# Altium PCB GPS.PcbDoc
Units mm, origin at the board's own origin, x right, y up, seen from the top; angles counter-clockwise.
Board outline 70.99 x 79.22 mm, 2 copper layers (TopLayer, BottomLayer); 28 components, 23 nets, 124 pads, 0 vias.
Unrouted connection lines stored in the file: 3.
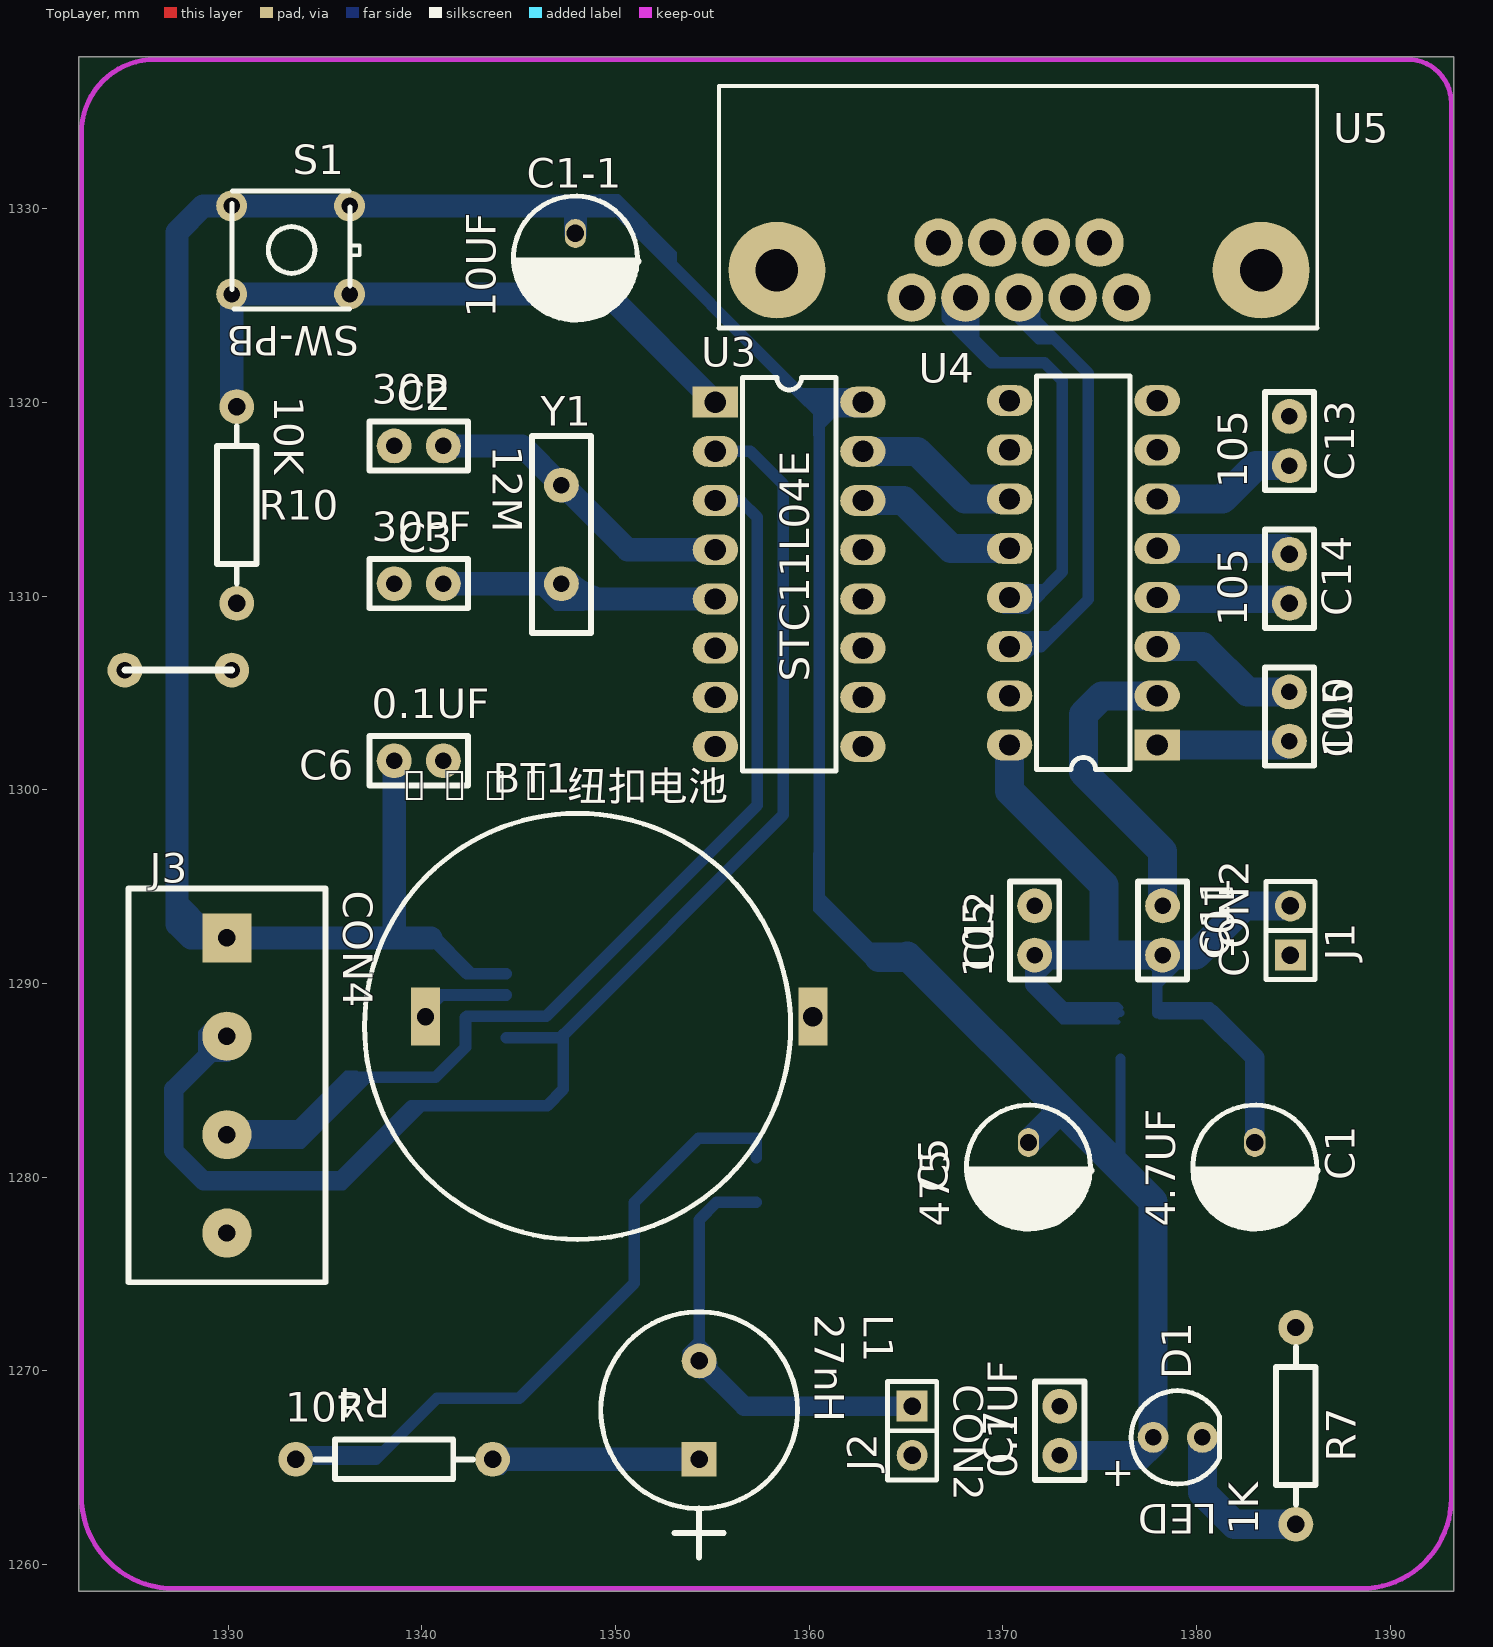
[diagram p0: TopLayer view]
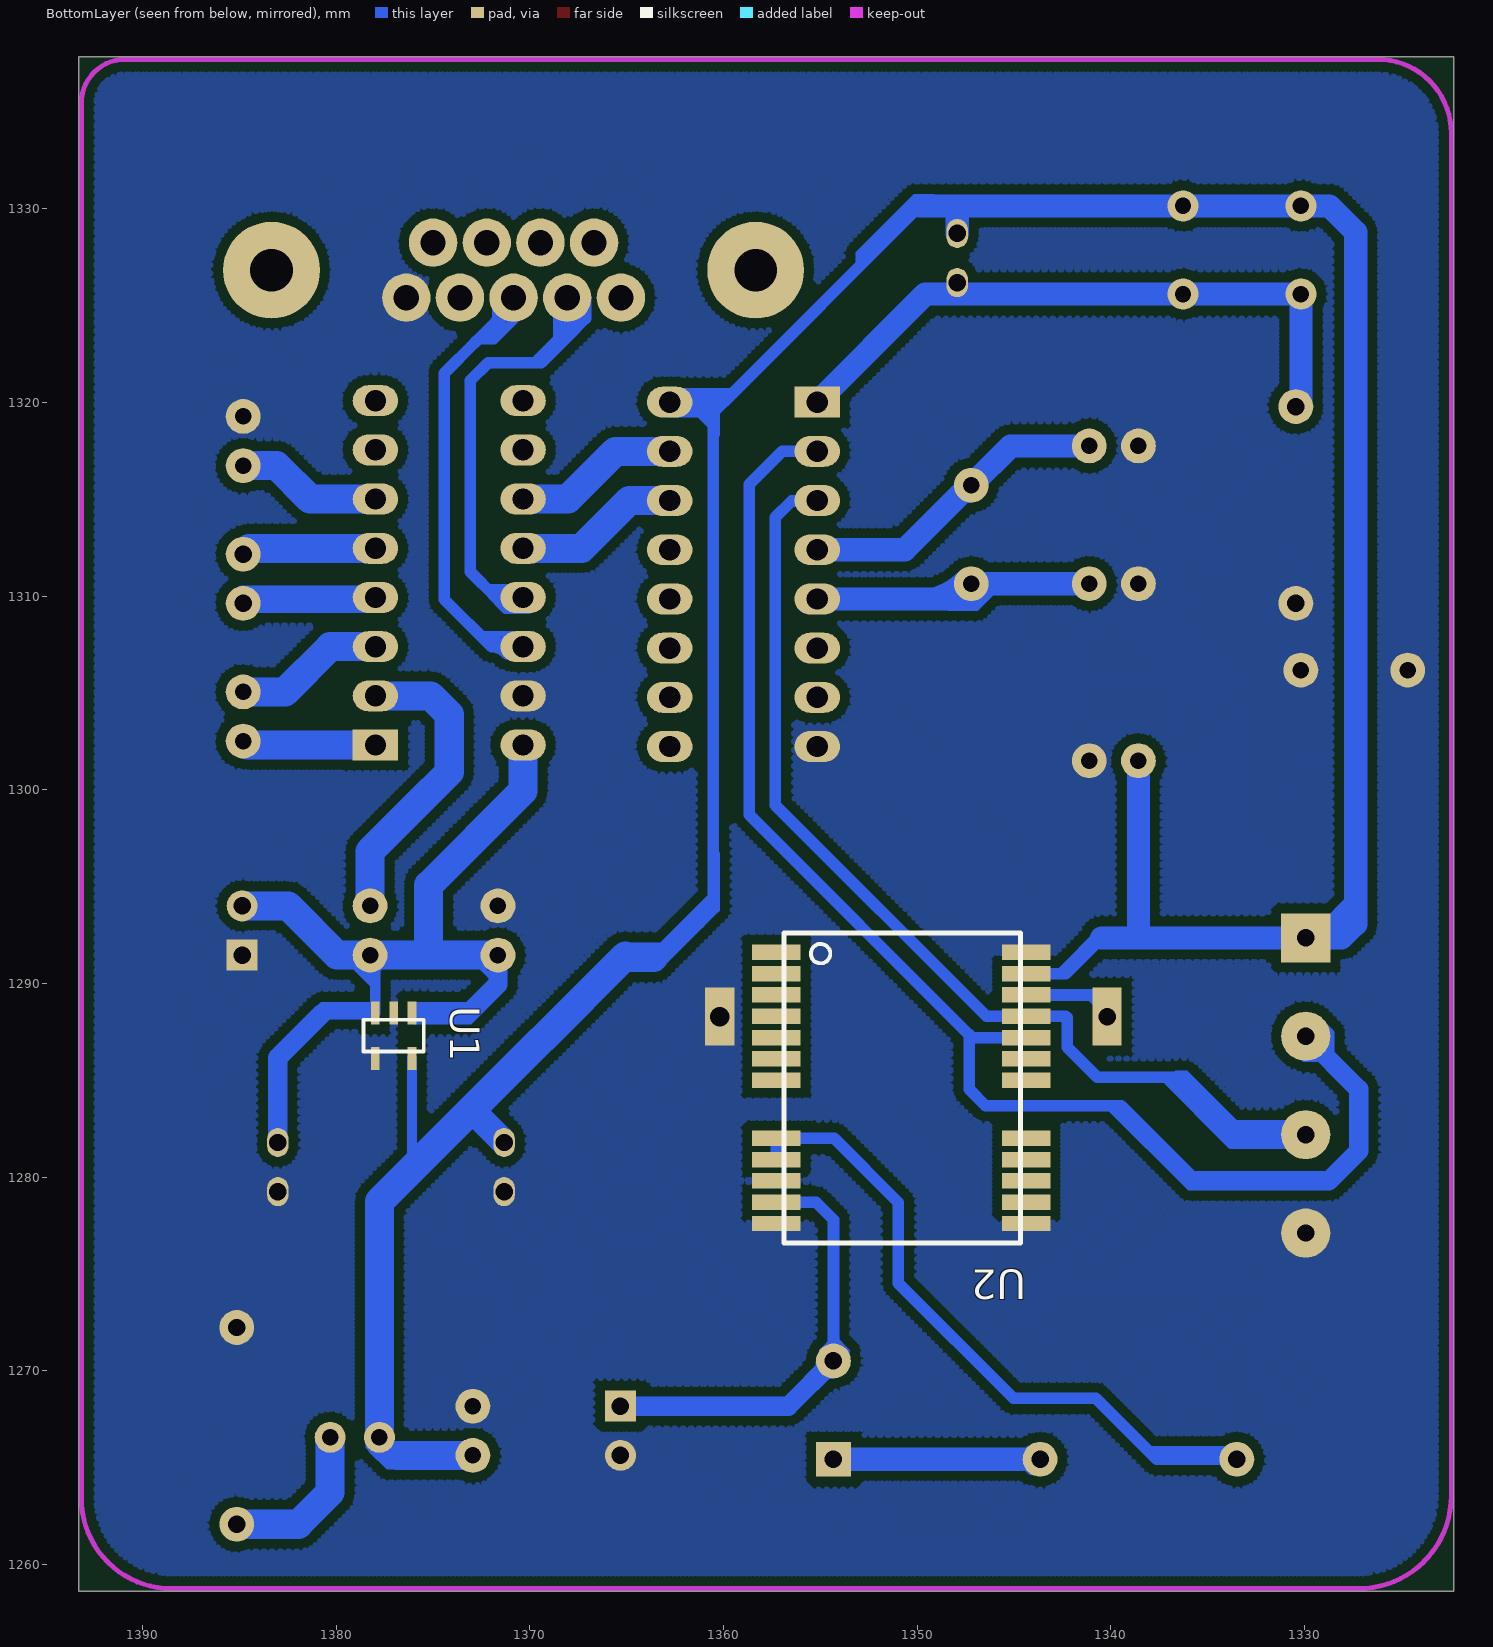
[diagram p1: BottomLayer view, seen from below]

## Layer stack, top to bottom
TopLayer: signal copper 0.0356
Dielectric: dielectric 0.32, FR-4, Dk 4.8
BottomLayer: signal copper 0.0356

## Board outline
1322.299,1258.621 1393.292,1258.621 1393.292,1337.843 1322.299,1337.843

## Design rules (kind name [scope] priority, off if disabled: settings)
Clearance [All] p1: gap=0.5
ComponentClearance [All] p1: gap=0.254 collisioncheckmode=0 verticalgap=0.254
PolygonConnect [All] p1: connectstyle=Direct reliefconductorwidth=0.6 reliefentries=4 polygonreliefangle="90 Angle"
RoomDefinition yabin [InComponentClass('yabin')] p1: confinementstyle=ConfineIn formatcopy=TRUE lockcomponents=FALSE outline 0,0 50.8,0 50.8,25.4 0,25.4
RoutingVias [All] p1: holewidth=0.711 width=1.27 viastyle="Through Hole" minholewidth=0.711 minwidth=1.27 maxholewidth=0.711 maxwidth=1.27
SolderMaskExpansion [All] p1: expansion=0.102
TestPointUsage [All] p1: valid=0 allowmultiple=FALSE
Testpoint [All] p1: side=15 testpointundercomponent=TRUE minsize=1.016 maxsize=2.54 preferedsize=1.524 minholesize=0.508 maxholesize=1.016 preferedholesize=0.813 testpointgrid=0.025 style=1023 order=0123456789
Width [All] p1: maxlimit=0.6 minlimit=0.6 preferedwidth=0.6
18 further rules are at their usual default settings.

## Components (designator, comment, footprint, x,y, rotation, side; value= is the part's Value field where it differs from the comment)
BT1 "3.3V 纽扣电池" CR2032 1346.708,1290.32 r0 top
C1 "4.7UF" 4.7UF 1384.325,1277.417 r90 top
C1-1 "10UF" 4.7UF 1349.248,1324.356 r90 top
C2 "30P" RAD-0.1#1 1338.58,1317.752 r0 top
C3 "30PF" RAD-0.1#1 1338.58,1310.64 r0 top
C5 "475" 4.7UF 1372.641,1277.417 r90 top
C6 "0.1UF" RAD-0.1#1 1338.58,1301.496 r0 top
C7 "0.1UF" RAD-0.1#1 1372.946,1265.631 r90 top
C10 "105" RAD-0.1#1 1384.808,1302.512 r90 top
C11 "105" RAD-0.1#1 1378.255,1294.003 r270 top
C12 "105" RAD-0.1#1 1371.651,1291.463 r90 top
C13 "105" RAD-0.1#1 1384.808,1316.736 r90 top
C14 "105" RAD-0.1#2 1384.808,1309.624 r90 top
D1 "LED" LED 1381.049,1268.882 r180 top
J1 "CON2" SIP-2 1384.859,1291.463 r90 top
J2 "CON2" SIP-2 1365.326,1268.171 r270 top
J3 "CON4" POWER-4 1329.944,1292.352 r270 top
L1 "27nH" RB-.2/.4 1354.328,1265.428 r270 top
R4 "10R" AXIAL-0.4 1333.5,1265.428 r0 top
R7 "1K" AXIAL-0.4 1385.138,1262.075 r90 top
R10 "10K" AXIAL-0.4 1330.452,1319.784 r270 top
S1 "SW-PB" SW-PB 1336.548,1330.96 r180 top
U1 "" SOT23-5 1378.737,1288.186 r270 bottom
U2 "" NEO-6M 1344.676,1276.604 r0 bottom
U3 "STC11L04E" DIP-16 1356.462,1308.125 r0 top
U4 "" DIP-16 1376.68,1314.196 r180 top
U5 "" VGA 1355.344,1323.848 r0 top
Y1 "12M" XTAL-1 1347.216,1315.72 r270 top

## Footprints (in the part's own frame and the unit in brackets; to place one, negate y for a bottom-side part, rotate by r counter-clockwise, add the part's x,y. Pads: shape width x height; smd on the part's side, far side on the other; paste and mask are expansions set on the pad)
4.7UF [mm]
  oval 1.5x1.1 hole 0.9: 1(4.37,1.309) 2(1.83,1.309)
  silkscreen extent -0.1,-1.89 6.3,4.51
AXIAL-0.4 [mm]
  round 1.8 hole 0.9: 1(0,0) 2(10.16,0)
  silkscreen extent 1.02,-1.02 9.14,1.02
CR2032 [mm]
  rect 1.5x3 hole 0.9: 1(-6.509,-2.032)
  rect 1.5x3 hole 1: 2(13.491,-2.032)
  silkscreen extent -9.66,-13.54 12.34,8.46
DIP-16 [mm]
  rect 2.35x1.6 hole 1.1: 1(-1.295,11.887)
  oval 2.35x1.6 hole 1.1: 2(-1.295,9.347) 3(-1.295,6.807) 4(-1.295,4.267) 5(-1.295,1.727) 6(-1.295,-0.813) 7(-1.295,-3.353) 8(-1.295,-5.893) 9(6.325,-5.893) 10(6.325,-3.353) 11(6.325,-0.813) 12(6.325,1.727) 13(6.325,4.267) 14(6.325,6.807) 15(6.325,9.347) 16(6.325,11.887)
  silkscreen extent 0.1,-7.16 4.93,13.16
LED [mm]
  round 1.6 hole 0.85: A(3.277,2.321) K(0.737,2.321)
  silkscreen extent -0.15,-0.09 4.42,4.73
NEO-6M [mm]
  rect 2.5x0.8 smd: 1(12.6,-15) 2(12.6,-13.9) 3(12.6,-12.8) 4(12.6,-11.7) 5(12.6,-10.6) 6(12.6,-9.5) 7(12.6,-8.4) 8(12.6,-5.4) 9(12.6,-4.3) 10(12.6,-3.2) 11(12.6,-2.1) 12(12.6,-1) 13(-0.3,-1) 14(-0.3,-2.1) 15(-0.3,-3.2) 16(-0.3,-4.3) 17(-0.3,-5.4) 18(-0.3,-8.4) 19(-0.3,-9.5) 20(-0.3,-10.6) 21(-0.3,-11.7) 22(-0.3,-12.8) 23(-0.3,-13.9) 24(-0.3,-15)
  silkscreen extent 0,-16 12.2,0
POWER-4 [mm]
  rect 2.54x2.54 hole 0.9: 1(0,0)
  round 2.54 hole 0.9: 2(5.08,0) 3(10.16,0) 4(15.24,0)
  silkscreen extent -2.54,-5.08 17.78,5.08
RAD-0.1#1 [mm]
  round 1.8 hole 0.85: 1(0,0) 2(2.54,0)
  silkscreen extent -1.27,-1.27 3.81,1.27
RAD-0.1#2 [mm]
  round 1.8 hole 0.9: 1(0,0) 2(2.54,0)
  silkscreen extent -1.27,-1.27 3.81,1.27
RB-.2/.4 [mm]
  rect 1.8x1.8 hole 0.9: 1(0,0)
  round 1.8 hole 0.9: 2(-5.08,0)
  silkscreen extent -7.62,-5.08 5.08,5.08
SIP-2 [mm]
  rect 1.6x1.6 hole 0.9: 1(0,0)
  round 1.6 hole 0.9: 2(2.54,0)
  silkscreen extent -1.27,-1.27 3.81,1.27
SOT23-5 [mm]
  rect 1.2x0.45 smd: 1(-0.29,2.651) 2(-0.29,1.701) 3(-0.29,0.751) 4(2.06,0.751) 5(2.06,2.651)
  silkscreen extent 0.06,0.15 1.71,3.25
SW-PB [mm]
  round 1.6 hole 0.85: 1(0.269,0.814) 1(6.359,0.814) 2(0.269,5.364) 2(6.359,5.364)
  silkscreen extent -0.25,0.04 6.34,6.14
VGA [mm]
  round 5 hole 2.2: 0(3,2.98) 0(28,2.98)
  round 2.5 hole 1.3: 1(9.96,1.56) 2(12.73,1.56) 3(15.5,1.56) 4(18.27,1.56) 5(21.04,1.56) 6(11.345,4.4) 7(14.115,4.4) 8(16.885,4.4) 9(19.655,4.4)
  silkscreen extent 0,0 30.9,12.5
XTAL-1 [mm]
  round 1.8 hole 0.85: 1(0,0) 2(5.08,0)
  silkscreen extent -2.54,-1.52 7.62,1.52

## Free pads (board coordinates)
  round 1.8 hole 0.85: 15(1324.677,1306.179) 16(1330.194,1306.178)

## Nets (pads, with @x,y where several pads share a name; then routed paths per layer and width w, separated by ;. In a path a pad name is that pad's centre, name@x,y a point inside that pad or via, vN(x,y) a via of type N, cw(c..) or ccw(c..) an arc to the next point about the centre after c; other vN are vias at no path point)
3.3V: C1-1.1 C5.1 C6.1 C7.1 D1.A J3.1 S1.1 U1.5 U2.23 U3.16 | length 181.8
  BottomLayer w0.254: 1369.378,1287.107 1369.403,1287.107
  BottomLayer w0.35: C5.1 C5.1@1371.433,1281.787
  BottomLayer w0.5: 1376.086,1280.424 U1.5
  BottomLayer w0.55: 1364.996,1290.824 cw(c1364.996,1289.219) 1366.131,1290.354 ; 1365.508,1291.336 ccw(c1366.378,1291.336) 1365.763,1290.721 ; C5.1@1371.433,1281.787 1373.078,1283.432 ; 1376.842,1265.631 D1.A
  BottomLayer w0.6: 1327.365,1293.051 1327.39,1293.051 ; 1340.478,1292.352 1342.326,1290.504 U2.23 ; 1347.927,1330.146 1347.939,1330.135 ; 1349.858,1330.146 1359.992,1320.013 U3.16 ; U3.16@1361.694,1320.013 1360.526,1318.844 1360.526,1294.435 1363.624,1291.336
  BottomLayer w1.2: 1327.365,1293.051 1327.365,1328.787 1328.724,1330.146 1330.189,1330.146 1349.858,1330.146 ; 1327.39,1293.051 1328.09,1292.352 1340.478,1292.352 ; 1338.58,1292.352 C6.1 ; C1-1.1 1347.939,1330.135
  BottomLayer w1.5: 1363.624,1291.336 1364.996,1291.336 ; 1365.072,1291.412 1369.378,1287.107 ; 1369.403,1287.107 1377.772,1278.738 D1.A ; C7.1 1376.842,1265.631
GND: BT1.2 C1.2 C2.1 C3.1 C5.2 C6.2 C7.2 C12.2 C13.2 J1.1 J2.2 J3.4 pad.15 pad.16 R7.2 R10.2 U1.2 U1.4 U2.10 U2.12 U2.13 U2.24 U3.8 U4.15 U5.5
NetBT1_1: BT1.1 U2.22 | length 5
  BottomLayer w0.6: BT1.1 1340.199,1288.561 1341.042,1289.404 ; BT1.1@1340.845,1289.404 U2.22
NetC1-1_2: C1-1.2 R10.1 S1.2 U3.1 | length 33.2
  BottomLayer w0.6: R10.1@1330.189,1320.047 R10.1
  BottomLayer w1.2: R10.1@1330.189,1320.047 1330.189,1325.596 1349.582,1325.596 U3.1
NetC2_2: C2.2 U3.4 | length 23.5
  BottomLayer w0.4: 1347.216,1315.72 1347.318,1315.72
  BottomLayer w0.8: C2.2@1341.474,1317.398 cw(c1342.327,1316.545) 1342.327,1317.752 cw(c1342.327,1318.959) C2.2@1341.474,1318.106 ; 1346.716,1315.72 ccw(c1345.509,1315.72) 1346.362,1316.574 ccw(c1347.216,1317.427) 1347.216,1316.22 ; 1347.216,1315.22 cw(c1347.216,1313.768) 1348.243,1314.795 ; 1347.716,1315.72 ccw(c1348.678,1315.72) 1347.998,1315.04 ; U3.4@1354.508,1312.11 ccw(c1353.826,1311.427) 1353.826,1312.393 ccw(c1353.826,1313.358) U3.4@1354.508,1312.675
  BottomLayer w1.2: C2.2 1345.184,1317.752 1347.216,1315.72 ; 1347.318,1315.72 1350.645,1312.393 U3.4
NetC3_2: C3.2 U3.5 Y1.2 | length 26
  BottomLayer w0.8: C3.2@1341.474,1310.286 cw(c1342.327,1309.433) 1342.327,1310.64 cw(c1342.327,1311.847) C3.2@1341.474,1310.994 ; Y1.2@1346.862,1310.286 ccw(c1346.009,1309.433) 1346.009,1310.64 ccw(c1346.009,1311.847) Y1.2@1346.862,1310.994 ; Y1.2@1347.004,1310.428 ccw(c1348.393,1311.817) 1348.393,1309.853 ; Y1.2 1348.003,1309.853 ; Y1.2@1347.245,1310.141 cw(c1347.303,1309.153) 1348.003,1309.853 ; Y1.2@1347.57,1310.994 ccw(c1350.324,1313.748) 1350.324,1309.853 ; Y1.2@1347.715,1310.611 ccw(c1348.703,1310.553) 1348.003,1309.853 ; U3.5@1354.508,1309.57 ccw(c1353.826,1308.887) 1353.826,1309.853 ccw(c1353.826,1310.818) U3.5@1354.508,1310.135
  BottomLayer w1.2: C3.2 Y1.2 ; 1348.003,1309.853 U3.5
NetC10_1: C10.1 U4.1 | length 9.9
  BottomLayer w0.4: C10.1@1384.605,1302.309 C10.1
  BottomLayer w0.8: U4.1@1378.633,1302.026 cw(c1379.316,1301.343) 1379.316,1302.309 cw(c1379.316,1303.274) U4.1@1378.633,1302.592 ; 1383.11,1302.309 ccw(c1383.11,1304.21) C10.1@1384.454,1302.866
  BottomLayer w1.5: U4.1 C10.1@1384.605,1302.309
NetC10_2: C10.2 U4.3 | length 7.8
  BottomLayer w1.5: U4.3 1380.312,1307.389 1382.649,1305.052 C10.2
NetC11_1: C11.1 U4.2 | length 17.6
  BottomLayer w1.5: 1375.054,1300.023 1378.255,1296.822 C11.1 ; 1376.322,1298.755 1374.165,1300.912 1374.165,1303.884 1375.131,1304.849 U4.2
NetC13_1: C13.1 U4.6 | length 11
  BottomLayer w0.8: U4.6@1378.633,1314.726 cw(c1379.316,1314.043) 1379.316,1315.009 cw(c1379.316,1315.974) U4.6@1378.633,1315.292 ; C13.1@1384.454,1316.382 ccw(c1383.601,1315.529) 1383.601,1316.736 ccw(c1383.601,1317.943) C13.1@1384.454,1317.09
  BottomLayer w1.5: U4.6 1381.354,1315.009 1383.081,1316.736 C13.1
NetC14_1: C14.1 U4.4 | length 7
  BottomLayer w0.4: U4.4 U4.4@1378.28,1309.624
  BottomLayer w1: U4.4@1378.28,1309.624 C14.1
NetC14_2: C14.2 U4.5 | length 7
  BottomLayer w0.4: C14.2@1384.503,1312.469 C14.2
  BottomLayer w1.5: U4.5 C14.2@1384.503,1312.469
NetD1_K: D1.K R7.1 | length 8.3
  BottomLayer w1.5: D1.K 1380.312,1263.726 1381.963,1262.075 R7.1
NetL1_1: L1.1 R4.2 | length 10.7
  BottomLayer w1.2: R4.2 L1.1
NetR4_1: R4.1 U2.8 U2.9 | length 34.1
  BottomLayer w0.6: R4.1 1337.64,1265.428 1340.79,1268.578 1345.032,1268.578 1350.975,1274.521 1350.975,1278.687 1354.292,1282.004 U2.8 U2.9@1357.276,1281.004
NetU4_13: U4.13 U5.3 | length 21.1
  BottomLayer w0.4: 1368.074,1323.386 1368.074,1325.408 ; U4.13 1371.752,1309.929
  BottomLayer w0.6: 1368.074,1323.386 1369.416,1322.045 1372.159,1322.045 1373.073,1321.13 1373.073,1311.25 1371.752,1309.929
NetU4_14: U4.14 U5.2 | length 23.7
  BottomLayer w0.35: 1371.496,1325.408 1371.539,1325.408 1371.752,1325.194
  BottomLayer w0.4: 1371.752,1324.178 1371.752,1325.194
  BottomLayer w0.6: U4.14 1371.981,1307.389 ; U4.14@1371.198,1307.013 cw(c1371.981,1306.386) 1371.981,1307.389 ; U4.14@1371.198,1307.764 ccw(c1371.981,1308.392) 1371.981,1307.389 ; 1371.752,1324.178 1372.809,1323.121 1374.419,1321.511 1374.419,1309.827 1371.981,1307.389
"RF IN": J2.1 L1.2 U2.11 | length 27.2
  BottomLayer w0.6: L1.2 1354.328,1277.671 ; 1354.328,1273.064 1354.328,1277.806 1355.226,1278.704 U2.11
  BottomLayer w1: L1.2 1356.665,1268.171 J2.1
RXD: U3.14 U4.12 | length 12.2
  BottomLayer w0.65: U3.14@1363.497,1314.597 cw(c1364.308,1313.786) 1364.308,1314.933 cw(c1364.308,1316.079) U3.14@1363.497,1315.268 ; U4.12@1369.645,1312.133 ccw(c1368.834,1311.322) 1368.834,1312.469 ccw(c1368.834,1313.616) U4.12@1369.645,1312.805
  BottomLayer w1.5: U3.14 1364.869,1314.933 1367.333,1312.469 U4.12
RXD1: J3.3 U2.21 U3.3 | length 52.7
  BottomLayer w0.6: 1333.475,1282.192 1336.446,1285.164 1340.714,1285.164 1342.263,1286.713 1342.263,1288.241 1342.326,1288.304 1346.426,1288.304 1357.325,1299.203 1357.325,1314.069 1356.487,1314.907 1355.192,1314.907 U3.3
  BottomLayer w1.5: J3.3 1333.475,1282.192
TXD: U3.15 U4.11 | length 12.2
  BottomLayer w0.65: U3.15@1363.497,1317.137 cw(c1364.308,1316.326) 1364.308,1317.473 cw(c1364.308,1318.619) U3.15@1363.497,1317.808 ; U4.11@1369.645,1314.673 ccw(c1368.834,1313.862) 1368.834,1315.009 ccw(c1368.834,1316.156) U4.11@1369.645,1315.345
  BottomLayer w1.5: U3.15 1365.58,1317.473 1368.044,1315.009 U4.11
TXD1: J3.2 U2.20 U3.2 | length 73
  BottomLayer w0.6: 1335.583,1279.804 1339.469,1283.691 1346.479,1283.691 1347.318,1284.529 1347.318,1287.374 ; U2.20 1346.426,1287.204 1347.173,1287.204 1358.671,1298.702 1358.671,1315.771 1356.97,1317.473 U3.2
  BottomLayer w1: J3.2 1327.201,1284.529 1327.201,1281.354 1328.75,1279.804 1335.583,1279.804
VCC_5V: C1.1 C11.2 C12.1 J1.2 U1.1 U1.3 U4.16 | length 48.8
  BottomLayer w0.4: 1373.139,1288.476 U1.1 ; U1.3 1380.708,1288.476 ; C11.2@1377.986,1291.194 C11.2
  BottomLayer w0.55: U1.3 C11.2@1377.986,1291.194
  BottomLayer w0.7: J1.2@1384.541,1293.685 ccw(c1383.772,1292.917) 1383.772,1294.003 ccw(c1383.772,1295.089) J1.2@1384.541,1294.321
  BottomLayer w1: C12.1 1371.651,1289.964 1373.139,1288.476 ; 1380.708,1288.476 1383.016,1286.168 C1.1
  BottomLayer w1.5: U4.16 1370.355,1299.947 1375.232,1295.07 1375.232,1291.463 ; C12.1 1379.957,1291.463 1382.497,1294.003 J1.2
pads on no net: U2.1 U2.2 U2.3 U2.4 U2.5 U2.6 U2.7 U2.14 U2.15 U2.16 U2.17 U2.18 U2.19 U3.6 U3.7 U3.9 U3.10 U3.11 U3.12 U3.13 U4.7 U4.8 U4.9 U4.10 U5.0 U5.1 U5.4 U5.6 U5.7 U5.8 U5.9 Y1.1
copper on no net: | length 317.7
  BottomLayer w0.1: 1371.505,1309.377 1372.108,1309.98
  BottomLayer w0.18: 1371.505,1309.377 1372.108,1309.98
  BottomLayer w0.254: 1326.896,1293.901 1326.921,1293.927 ; 1327.365,1294.13 1327.365,1293.813 1328.826,1292.352 ; 1327.365,1294.486 1327.633,1294.486 ; 1327.365,1294.714 1327.379,1294.714 ; 1328.572,1285.926 1328.572,1286.18 1328.572,1287.475 1329.106,1288.009 1330.096,1288.009 ; 1328.572,1286.51 1328.699,1286.51 1329.145,1286.065 1329.145,1286.355 1329.145,1286.305 1329.385,1286.065 ; 1328.572,1286.84 1328.572,1286.637 1328.877,1286.332 ; 1328.572,1287.297 1328.572,1286.967 1329.03,1286.51 ; 1328.737,1286.065 1330.032,1286.065 1330.757,1286.789 1330.757,1286.993 ; 1328.801,1293.012 1327.633,1294.181 ; 1329.131,1292.352 1327.633,1293.851 1327.633,1294.181 ; 1329.157,1292.733 1329.157,1292.962 1327.633,1294.486 ; 1329.995,1282.725 1333.449,1282.725 1335.888,1285.164 ; 1332.484,1281.786 1332.687,1281.582 1333.83,1281.582 1337.412,1285.164 ; 1332.967,1281.913 1333.094,1282.04 1333.932,1282.04 ; 1334.618,1279.474 1334.668,1279.423 1335.964,1279.423 1340.231,1283.691 ; 1334.897,1279.804 1336.091,1279.804 1339.85,1283.564 1339.85,1283.691 ; 1336.853,1285.164 1336.65,1285.367 1336.091,1285.367 1335.888,1285.164 ; 1336.954,1285.164 1335.888,1285.164 ; 1337.056,1285.164 1338.174,1285.164 ; 1338.809,1266.596 1338.199,1265.987 ; 1340.307,1292.809 1340.51,1292.809 1342.695,1290.625 1342.695,1290.504 ; 1343.558,1264.742 1344.168,1264.742 1344.828,1265.403 1344.828,1265.428 1344.244,1266.012 1343.711,1266.012 ; 1345.26,1310.64 1345.641,1310.64 1346.911,1309.37 1348.359,1309.37 ; 1345.616,1310.64 1345.895,1310.64 1346.937,1309.599 1347.699,1309.599 ; 1346.124,1310.64 1346.124,1310.411 1346.733,1309.802 1347.495,1309.802 1347.699,1309.599 ; 1346.657,1310.056 1346.81,1310.056 1347.064,1309.802 1347.267,1309.802 ; 1347.927,1309.37 1347.699,1309.599 ; 1347.939,1326.186 1347.939,1325.386 1348.003,1325.321 ; 1348.537,1330.146 1350.425,1330.146 1351.882,1328.689 1351.882,1328.58 1353.033,1327.429 1353.058,1327.429 ; 1349.121,1330.579 1349.172,1330.63 1350.137,1330.63 1353.058,1327.709 1353.058,1327.175 ; 1351.864,1328.141 1351.915,1328.191 ; 1353.16,1265.428 1353.795,1266.063 1354.125,1266.063 ; 1353.21,1265.428 1353.744,1264.895 1354.303,1264.895 ; 1353.591,1270.533 1353.591,1271.016 1354.328,1271.753 1354.328,1272.108 ; 1354.049,1269.924 1354.099,1269.924 1354.328,1269.695 1355.141,1269.695 ; 1354.328,1271.981 1354.328,1271.651 1354.938,1271.041 1354.938,1270.559 1355.014,1270.559 1355.141,1270.432 1355.141,1269.822 ; 1359.162,1320.843 1359.637,1320.368 1362.354,1320.368 1362.431,1320.444 ; 1359.256,1320.902 1359.535,1320.622 1362.608,1320.622 ; 1359.967,1320.368 1359.967,1320.243 1360.946,1319.264 ; 1360.195,1320.013 1360.424,1320.013 1360.78,1319.657 1361.059,1319.657 ; 1360.322,1294.867 1360.322,1294.079 1363.269,1291.133 1363.37,1291.133 ; 1360.322,1296.721 1360.322,1293.8 1361.121,1293.001 ; 1360.322,1318.311 1360.322,1319.454 1359.652,1320.124 ; 1360.526,1296.086 1360.526,1293.597 1363.345,1290.777 ; 1360.526,1316.787 1360.526,1319.251 1359.652,1320.124 ; 1360.678,1320.013 1360.678,1319.759 1361.034,1319.403 1361.084,1319.352 1362.786,1319.352 1362.989,1319.555 1361.694,1319.555 1361.491,1319.352 ; 1360.78,1319.251 1359.677,1320.353 1359.652,1320.353 1359.652,1320.124 ; 1361.895,1293.065 1362.964,1291.996 1365.275,1291.996 1365.402,1291.869 ; 1362.685,1292.327 1363.066,1291.946 1364.031,1291.946 ; 1364.056,1268.171 1364.31,1268.171 1364.844,1267.638 ; 1364.209,1268.171 1364.209,1268.197 1364.742,1268.73 ; 1367.13,1324.767 1367.13,1325.042 ; 1368.501,1323.315 1369.771,1322.045 ; 1368.501,1323.696 1368.501,1323.518 1369.974,1322.045 1370.736,1322.045 ; 1369.67,1302.156 1369.67,1301.852 1370.355,1301.166 ; 1369.822,1309.421 1370.051,1309.192 ; 1369.873,1308.075 1372.413,1308.075 1372.743,1308.405 ; 1370,1324.788 1370,1325.296 1370,1324.94 1371.819,1323.121 1372.809,1323.121 ; 1370.025,1310.488 1372.311,1310.488 1372.794,1310.97 ; 1370.178,1308.075 1371.473,1308.075 1371.956,1307.592 ; 1370.254,1310.488 1371.295,1310.488 1371.625,1310.157 ; 1370.355,1301.191 1371.295,1302.131 1371.295,1302.156 ; 1370.355,1309.192 1370.99,1309.192 ; 1370.355,1309.929 1370.355,1309.827 1370.99,1309.192 ; 1370.406,1310.157 1371.625,1310.157 ; 1370.844,1325.408 1370.844,1324.477 1371.149,1324.477 1371.549,1324.077 1371.549,1324.02 1371.874,1323.695 ; 1371.067,1324.864 1371.752,1324.178 ; 1371.117,1282.09 1371.143,1282.09 1372.269,1283.217 1372.269,1283.522 ; 1371.321,1310.488 1371.561,1310.488 1371.758,1310.29 ; 1371.346,1308.075 1371.803,1308.075 1372.184,1307.694 ; 1371.524,1281.278 1371.6,1281.278 1373.069,1282.747 1373.763,1282.747 ; 1371.651,1289.964 1372.819,1291.133 1372.819,1291.463 ; 1371.651,1290.447 1372.667,1291.463 1372.794,1291.463 ; 1371.688,1307.86 1371.944,1307.86 1372.159,1308.075 ; 1371.702,1309.599 1371.295,1309.192 1370.99,1309.192 ; 1371.727,1309.929 1371.752,1309.929 ; 1371.956,1310.488 1371.625,1310.157 ; 1372.028,1310.205 1371.016,1309.192 ; 1372.235,1323.334 1370.508,1325.062 1370.508,1325.118 1370.508,1324.712 1371.885,1323.334 1372.596,1323.334 ; 1372.311,1284.199 1372.311,1283.564 1371.117,1282.37 1371.117,1281.43 1371.27,1281.278 1371.27,1281.724 1371.332,1281.787 1371.345,1281.787 1371.524,1281.608 1371.727,1281.811 1371.498,1282.04 1371.498,1282.116 ; 1372.627,1283.883 1372.627,1283.879 1371.498,1282.751 1371.498,1282.116 ; 1372.641,1288.567 1372.641,1288.44 1373.073,1288.009 1375.969,1288.009 ; 1372.718,1265.123 1373.632,1265.123 1374.14,1265.631 ; 1372.972,1266.165 1373.505,1266.165 1374.038,1265.631 ; 1373.099,1288.237 1375.847,1288.237 1376.086,1288.476 ; 1373.463,1283.047 1373.268,1283.047 1371.829,1281.608 1371.829,1281.811 1373.041,1283.023 1373.487,1283.023 ; 1374.572,1291.463 1375.232,1292.123 1375.232,1292.86 ; 1375.232,1292.835 1375.232,1292.098 1375.867,1291.463 ; 1375.562,1265.072 1375.613,1265.022 1377.34,1265.022 1378.204,1265.885 1378.204,1265.911 1378.356,1266.063 1378.356,1266.596 ; 1376.197,1265.631 1376.705,1265.631 ; 1376.324,1265.631 1377.569,1265.631 1378.179,1266.241 1378.179,1266.266 1377.975,1266.266 1377.34,1265.631 ; 1376.426,1265.022 1376.959,1265.022 1377.878,1265.94 1377.878,1265.78 1377.434,1265.336 1377.274,1265.336 ; 1377.213,1291.463 1377.213,1291.296 1377.986,1290.523 ; 1377.823,1309.751 1378.128,1310.056 ; 1377.874,1307.059 1380.399,1307.059 1382.405,1305.052 ; 1377.986,1288.476 1378.204,1288.694 1380.617,1288.694 1381.128,1288.184 1381.128,1288.057 ; 1377.986,1288.923 1380.744,1288.923 1381.227,1288.44 1381.227,1288.136 ; 1377.986,1289.761 1379.358,1291.133 1379.576,1291.133 1379.296,1291.133 1378.204,1290.041 1378.204,1290.015 ; 1377.986,1290.142 1379.307,1291.463 1379.499,1291.463 ; 1377.986,1290.472 1378.61,1291.097 1378.61,1291.184 ; 1378.102,1288.263 1380.541,1288.263 1383.016,1285.787 1383.016,1285.418 ; 1378.56,1307.389 1378.991,1307.389 1379.322,1307.059 1380.275,1307.059 ; 1378.915,1312.139 1378.585,1312.469 1377.975,1312.469 1378.534,1311.91 1384.859,1311.91 1384.808,1311.961 1384.808,1312.164 1384.783,1312.139 ; 1379.703,1266.52 1379.703,1266.215 1380.312,1265.606 ; 1380.312,1265.631 1380.973,1266.292 1380.973,1266.546 ; 1382.446,1305.433 1384.427,1305.433 1384.808,1305.052 ; 1382.696,1286.489 1382.696,1281.942 1383.055,1281.582 ; 1383.97,1262.075 1384.021,1262.075 1384.554,1261.542 1384.96,1261.542 1385.265,1261.847 ; 1383.995,1262.075 1384.579,1262.659 1385.113,1262.659 ; 1327.633,1294.181 1327.633,1294.486 ; 1338.199,1265.987 1333.297,1265.987 1333.525,1265.758 1337.97,1265.758 1338.199,1265.987 ; 1370.051,1309.192 1371.016,1309.192 ; 1370.051,1309.192 1371.016,1309.192 ; 1371.498,1282.116 1371.498,1282.395 1372.585,1283.482 1372.585,1283.533 1372.591,1283.538 1372.591,1283.208 1371.498,1282.116 ; 1372.87,1288.923 1375.943,1288.923 1376.121,1288.745 1376.07,1288.694 1373.099,1288.694 1372.87,1288.923 ; 1377.817,1294.441 1378.255,1294.003 1378.255,1294.384 1378.026,1294.613 1378.026,1297.051 1377.817,1297.261 1377.817,1294.441
  BottomLayer w0.4: 1333.932,1282.04 1337.056,1285.164 ; 1367.13,1324.767 1368.074,1323.823 ; 1378.915,1312.139 1384.783,1312.139
  BottomLayer w0.6: 1367.13,1325.423 1367.13,1324.331 1368.074,1323.386 ; 1368.501,1323.315 1368.501,1324.839
  BottomLayer w1: 1378.128,1310.056 1384.833,1310.056

## Polygon pours and split planes (outlines as drawn)
GND on BottomLayer "BottomLayer-GND" (hatched 45Degree grid 0.3 track 0.3, remove dead copper, pour order 1000): 1315.161,1298.931 1315.161,1256.767 1397.787,1256.767 1397.787,1343.635 1313.739,1343.635 1313.739,1299.794 1315.009,1298.524 1315.288,1298.524

## Keep-outs
KeepOutLayer:
  lines w0.254: 1385.875,1337.716 1390.904,1337.716 cw(c1390.904,1335.456) 1393.165,1335.456 1393.165,1263.421 cw(c1388.491,1263.421) 1388.491,1258.748 1327.226,1258.748 cw(c1327.226,1263.548) 1322.426,1263.548 1322.426,1333.906 cw(c1326.236,1333.906) 1326.236,1337.716 1386.23,1337.716

## Silkscreen, mask and mechanical layers (free items; w line width, h text height)
TopOverlay:
  lines w0.35: 1324.677,1306.179 1324.679,1306.178 1330.194,1306.178

## Text inside footprints (layer, text, board x,y; h text height)
D1: TopOverlay "+" at 1376.807,1265.317 h1.5 r180